# Altium PCB DriveBoardSheet.PcbDoc
Units mil, origin at the board's own origin, x right, y up, seen from the top; angles counter-clockwise.
Board outline 1968.5 x 1968.5 mil, 2 copper layers (Top Layer, Bottom Layer); 14 components, 21 nets, 54 pads, 4 vias.
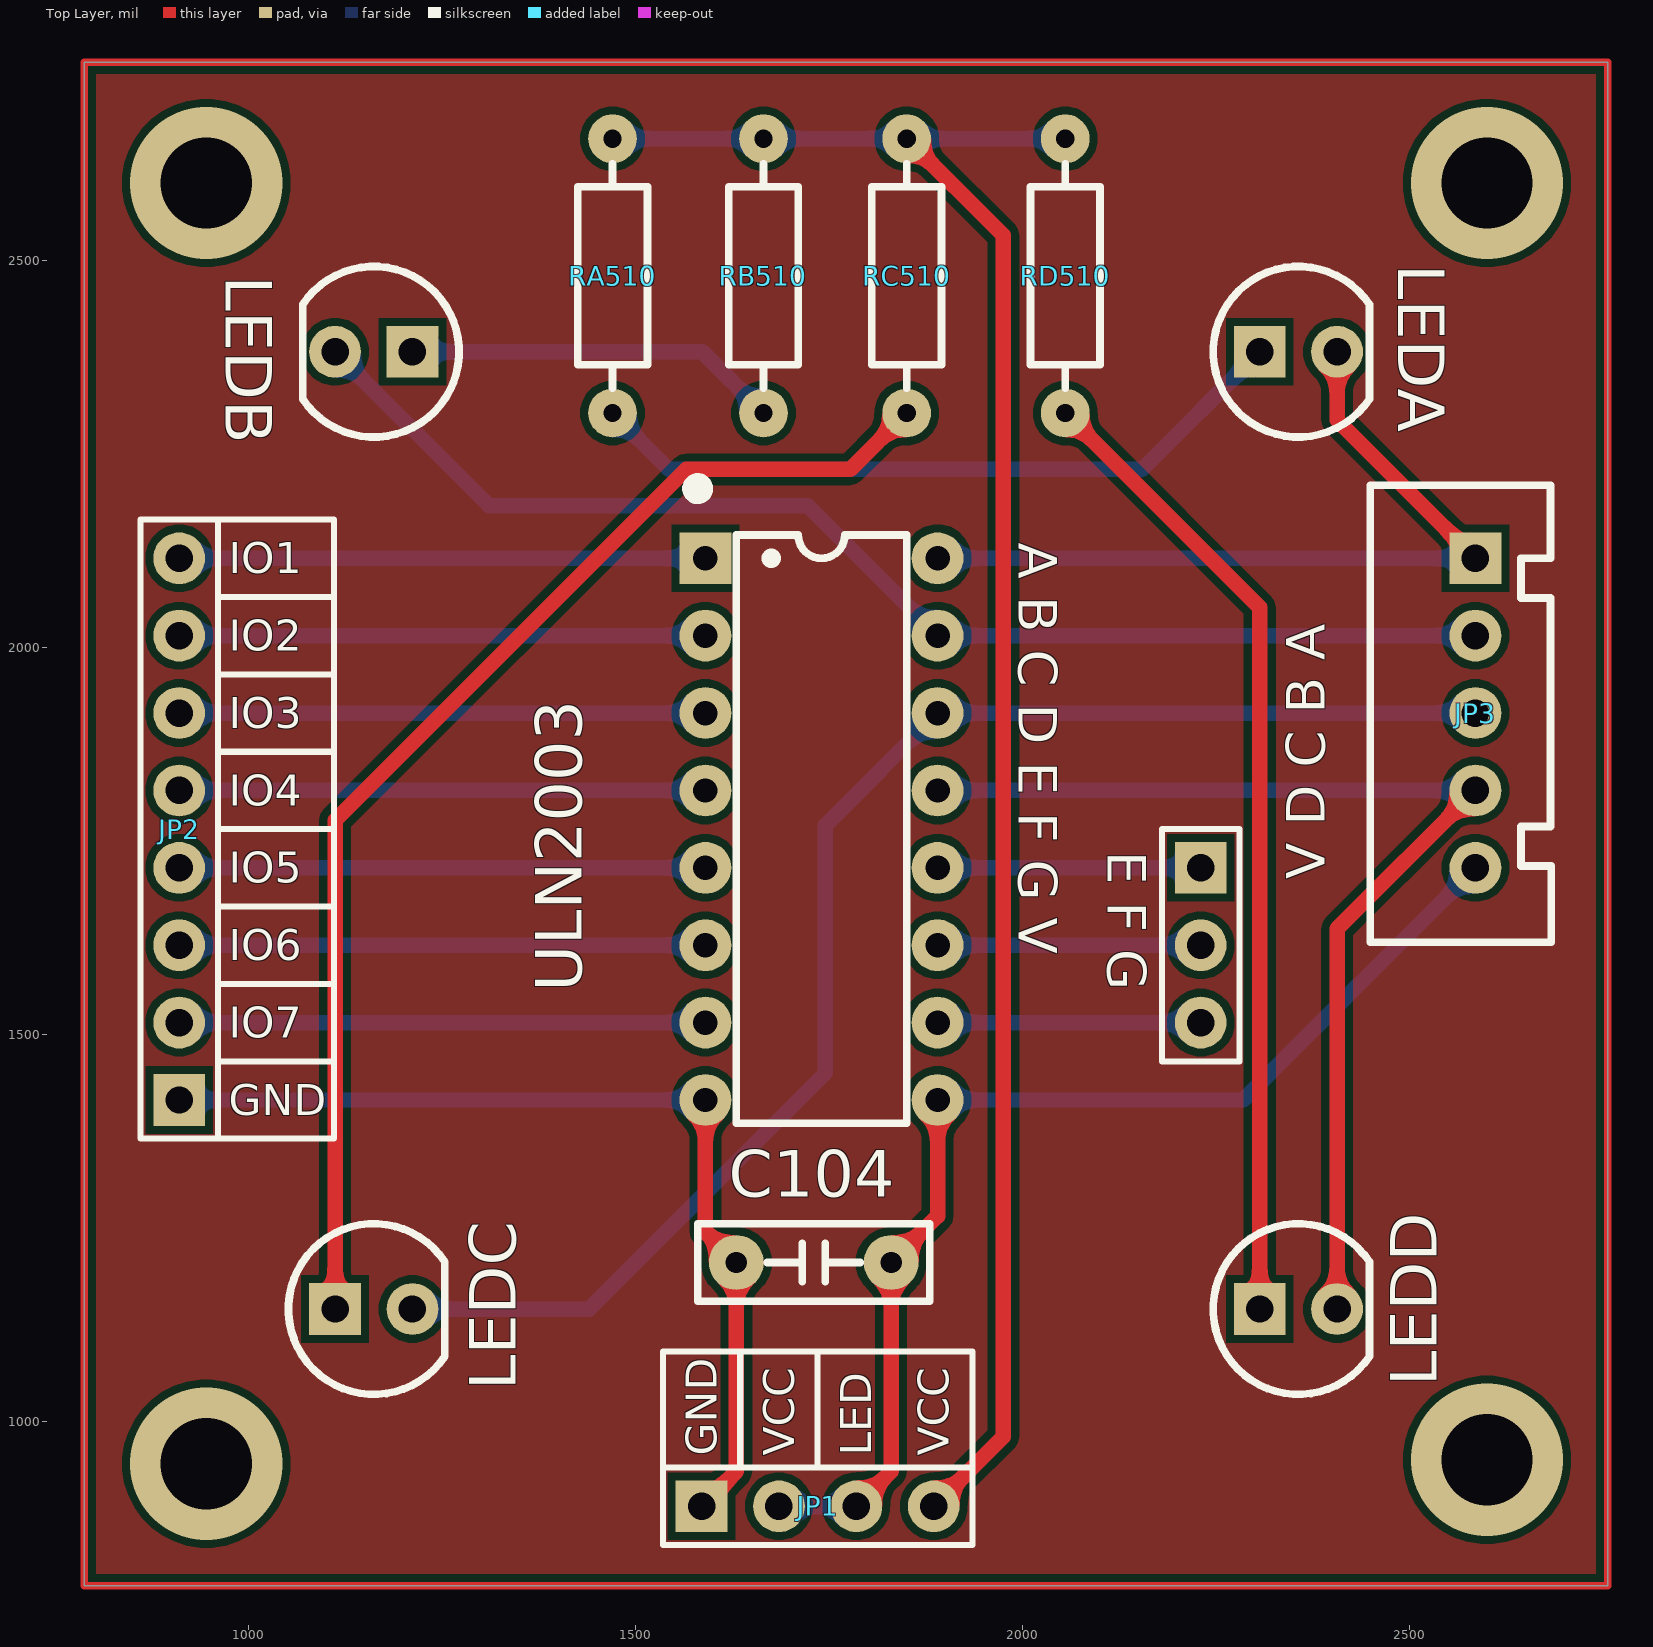
[diagram p0: Top Layer view]
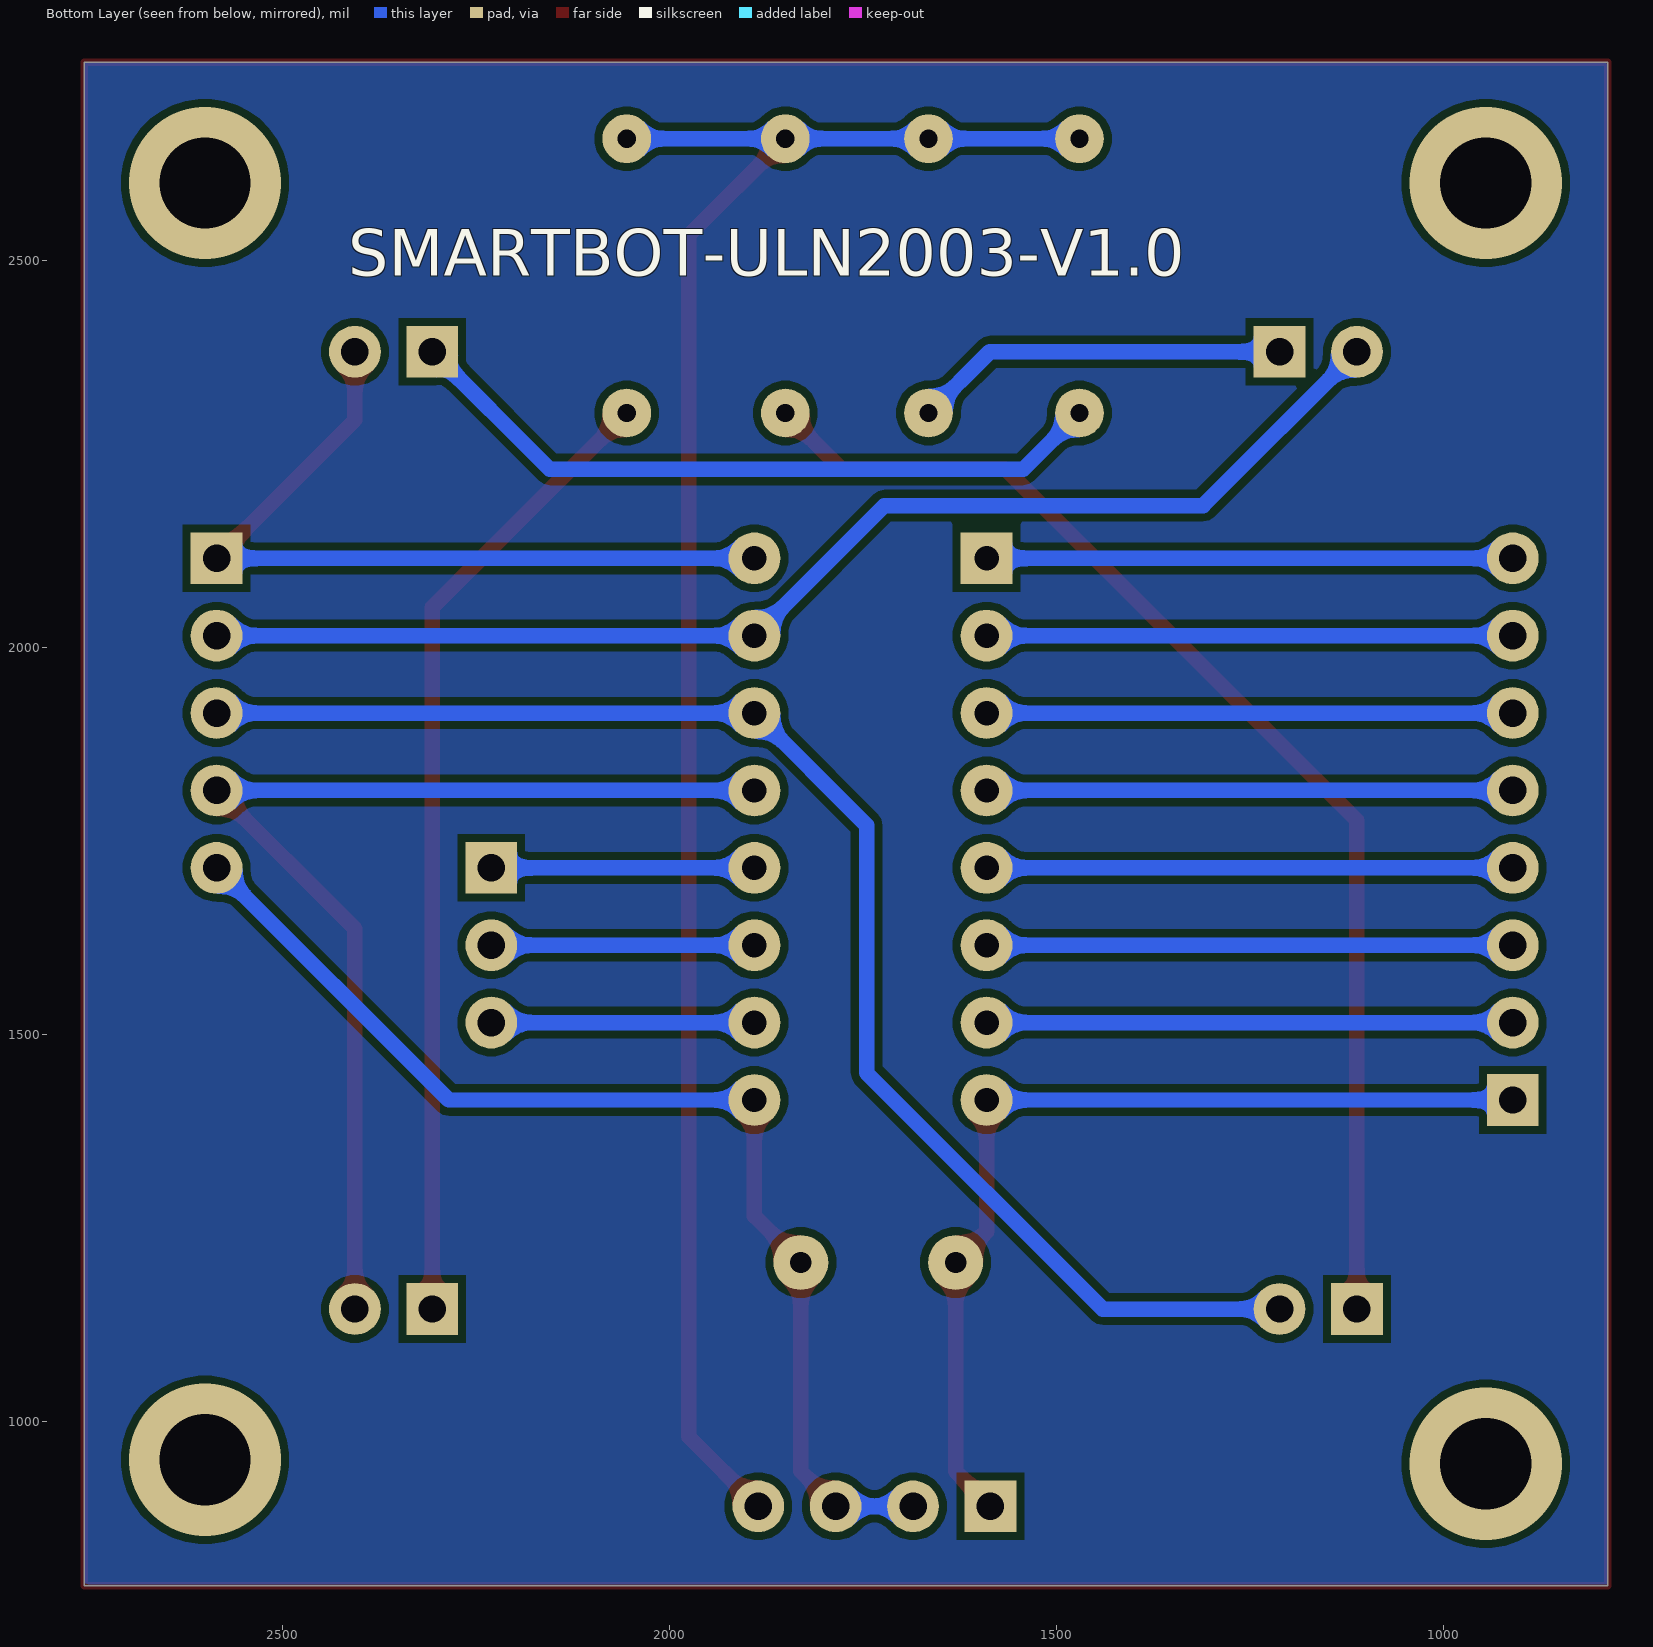
[diagram p1: Bottom Layer view, seen from below]

## Layer stack, top to bottom
Top Solder: solder mask 0.4, Solder Resist, Dk 3.5
Top Layer: signal copper 1.4
Dielectric 1: dielectric 12.6, FR-4, Dk 4.8
Bottom Layer: signal copper 1.4
Bottom Solder: solder mask 0.4, Solder Resist, Dk 3.5

## Board outline
787.4,787.4 2755.91,787.4 2755.91,2755.91 787.4,2755.91
cut-out: 0,0 10,0 10,10 0,10
cut-out: 0,0 10,0 10,10 0,10

## Design rules (kind name [scope] priority, off if disabled: settings)
Clearance [All] p1: gap=10 ignorepadtopadclearanceinfootprint=FALSE except(0: Arc-Hole Track-Hole SMDPad-Hole THPad-Hole Via-Hole Fill-Hole Poly-Hole Region-Hole Text-Hole)
PolygonConnect [All] p1: connectstyle=Relief reliefconductorwidth=10 reliefentries=4 polygonreliefangle="90 Angle" airgapwidth=10
RoomDefinition DriveBoardSheet [InComponentClass('DriveBoardSheet')] p1: confinementstyle=ConfineIn formatcopy=TRUE lockcomponents=FALSE outline 787.4,787.4 2755.91,787.4 2755.91,2755.91 787.4,2755.91
RoutingVias [All] p1: holewidth=28 width=50 viastyle="Through Hole" minholewidth=28 minwidth=50 maxholewidth=28 maxwidth=50
SolderMaskExpansion [All] p1: expansion=4 istentingtop=FALSE
Width [All] p1: maxlimit=20 minlimit=20 preferedwidth=20 minimp=50.000000 maximp=50.000000 favimp=50.000000
30 further rules are at their usual default settings.

## Components (designator, comment, footprint, x,y, rotation, side; value= is the part's Value field where it differs from the comment)
C104 "104" MLCC5.08-A 1730,1205 r0 top
"E F G" "HDR-1X3" HDR-1X3 2230,1715 r270 top
JP1 "HDR-1X4" HDR-1X4-ULN2003-VCC 1585,890 r0 top
JP2 "HDR-1X8" HDR-1X8-ULN2003-IN 910,1415 r90 top
JP3 "HDR-1X5" XH2.54-5P-ULN2003-OUT 2585,2115 r270 top
LEDA "RED" "LED 5MM-R" 2356.3,2381.89 r0 top
LEDB "RED" "LED 5MM-R" 1161.42,2381.89 r180 top
LEDC "RED" "LED 5MM-R" 1161.42,1144.88 r0 top
LEDD "RED" "LED 5MM-R" 2356.3,1144.88 r0 top
RA510 "510" "RS 1/4W" 1470,2480 r90 top
RB510 "210" "RS 1/4W" 1665,2480 r90 top
RC510 "510" "RS 1/4W" 1850,2480 r90 top
RD510 "510" "RS 1/4W" 2055,2480 r90 top
ULN2003 "ULN2003" DIP16-300_MH 1740,1765 r0 top

## Footprints (in the part's own frame and the unit in brackets; to place one, negate y for a bottom-side part, rotate by r counter-clockwise, add the part's x,y. Pads: shape width x height; smd on the part's side, far side on the other; paste and mask are expansions set on the pad)
DIP16-300_MH [mm] "带底座 19.3*7.6*3.8(长宽高）"
  rect 1.7x1.7 hole 0.8: 1(-3.81,8.89)
  round 1.7 hole 0.8: 2(-3.81,6.35) 3(-3.81,3.81) 4(-3.81,1.27) 5(-3.81,-1.27) 6(-3.81,-3.81) 7(-3.81,-6.35) 8(-3.81,-8.89) 9(3.81,-8.89) 10(3.81,-6.35) 11(3.81,-3.81) 12(3.81,-1.27) 13(3.81,1.27) 14(3.81,3.81) 15(3.81,6.35) 16(3.81,8.89)
  silkscreen extent -4.32,-9.65 2.79,11.43, body extent -4.98,-10.25 5,10.25, height 7.5
HDR-1X3 [mm] "排针，3脚"
  rect 1.7x1.7 hole 0.9: 1(0,0)
  round 1.7 hole 0.9: 2(2.54,0) 3(5.08,0)
  silkscreen extent -1.27,-1.27 6.35,1.27, body extent -1.27,-1.27 6.35,1.27, height 8.5
HDR-1X4-ULN2003-VCC [mm] "排针，4脚"
  rect 1.7x1.7 hole 0.9: 1(0,0)
  round 1.7 hole 0.9: 2(2.54,0) 3(5.08,0) 4(7.62,0)
  silkscreen extent -1.27,-1.27 8.89,5.08, body extent -1.27,-1.27 8.89,1.27, height 8.5
HDR-1X8-ULN2003-IN [mm] "排针，8脚"
  rect 1.7x1.7 hole 0.9: 1(0,0)
  round 1.7 hole 0.9: 2(2.54,0) 3(5.08,0) 4(7.62,0) 5(10.16,0) 6(12.7,0) 7(15.24,0) 8(17.78,0)
  silkscreen extent -1.27,-5.08 19.05,1.27, body extent -1.27,-1.27 19.05,1.27, height 8.5
"LED 5MM-R" [mm] "红色5mm直插LED"
  rect 1.7x1.7 hole 0.9: 1(-1.27,0)
  round 1.7 hole 0.9: 2(1.27,0)
  silkscreen extent -2.8,-2.8 2.33,2.8, body extent -2.85,-2.85 2.45,2.85, height 8.75
MLCC5.08-A [mm] "独石电容，脚距5.08mm"
  round 1.8 hole 0.7: 1(-2.54,0) 2(2.54,0)
  silkscreen extent -3.81,-1.27 3.81,1.27, body extent -2.79,-1 2.79,1, height 3.71
"RS 1/4W" [mm] "直插色环电阻，脚距9mm，直径2.3mm"
  round 1.6 hole 0.6: 1(-4.5,0) 2(4.5,0)
  silkscreen extent -3.68,-1.14 3.68,1.14, body extent -4.72,-1.16 4.73,1.16, height 2.32
XH2.54-5P-ULN2003-OUT [mm] "接插件，5P"
  rect 1.7x1.7 hole 0.9: 1(0,0)
  round 1.7 hole 0.9: 2(2.54,0) 3(5.08,0) 4(7.62,0) 5(10.16,0)
  silkscreen extent -2.4,-3.45 12.6,2.49, body extent -2.5,-3.3 12.66,2.4, height 7.03

## Part data
C104: library part C-MLCC, "独石电容", BOM名称=独石电容, 学习资源=www.ooocke.com, 版权归属=源创客
"E F G": library part "Header 3", "3P接插件", BOM名称=3P接插件, 学习资源=www.ooocke.com, 版权归属=源创客
JP1: library part "Header 4", "4P接插件", BOM名称=4P接插件, 学习资源=www.ooocke.com, 版权归属=源创客
JP2: library part "Header 8_ULN2003AN_IN", "8P接插件", BOM名称=8P接插件, 学习资源=www.ooocke.com, 版权归属=源创客
JP3: library part "Header 5", "5P接插件", BOM名称=5P接插件, 学习资源=www.ooocke.com, 版权归属=源创客
LEDA LEDB LEDC LEDD: library part LED-5MM, "5mm插件LED", BOM名称=5mm插件LED, 学习资源=www.ooocke.com, 版权归属=源创客
RA510 RB510 RC510 RD510: library part R-CRR, "直插色环电阻", BOM名称=色环电阻, 学习资源=www.ooocke.com, 版权归属=源创客
ULN2003: library part ULN2003-2, "达林顿驱动芯片", BOM名称=达林顿驱动芯片, 学习资源=www.ooocke.com, 版权归属=源创客

## Via types
v1: diameter 196.85, hole 118.11, Top Layer to Bottom Layer, 4 vias

## Nets (pads, with @x,y where several pads share a name; then routed paths per layer and width w, separated by ;. In a path a pad name is that pad's centre, name@x,y a point inside that pad or via, vN(x,y) a via of type N, cw(c..) or ccw(c..) an arc to the next point about the centre after c; other vN are vias at no path point)
GND: C104.1 JP1.1 JP2.1 ULN2003.8 | length 1240.2
  Top Layer w20: JP1.1 1630,935 C104.1 1590,1245 ULN2003.8
  Bottom Layer w20: JP2.1 ULN2003.8
"NetE F G_1": "E F G.1" ULN2003.12 | length 340
  Bottom Layer w20: ULN2003.12 2230,1715
"NetE F G_2": "E F G.2" ULN2003.11 | length 340
  Bottom Layer w20: ULN2003.11 2230,1615
"NetE F G_3": "E F G.3" ULN2003.10 | length 340
  Bottom Layer w20: ULN2003.10 2230,1515
NetJP1_4: JP1.4 RA510.2 RB510.2 RC510.2 RD510.2 | length 2441.2
  Top Layer w20: RC510.2 1975,2532.17 1975,980 JP1.4
  Bottom Layer w20: RA510.2 RB510.2 RC510.2 RD510.2
NetJP2_2: JP2.2 ULN2003.7 | length 680
  Bottom Layer w20: JP2.2 ULN2003.7
NetJP2_3: JP2.3 ULN2003.6 | length 680
  Bottom Layer w20: JP2.3 ULN2003.6
NetJP2_4: JP2.4 ULN2003.5 | length 680
  Bottom Layer w20: JP2.4 ULN2003.5
NetJP2_5: JP2.5 ULN2003.4 | length 680
  Bottom Layer w20: JP2.5 ULN2003.4
NetJP2_6: JP2.6 ULN2003.3 | length 680
  Bottom Layer w20: JP2.6 ULN2003.3
NetJP2_7: JP2.7 ULN2003.2 | length 680
  Bottom Layer w20: JP2.7 ULN2003.2
NetJP2_8: JP2.8 ULN2003.1 | length 680
  Bottom Layer w20: JP2.8 ULN2003.1
NetJP3_1: JP3.1 LEDA.2 ULN2003.16 | length 1035.9
  Top Layer w20: LEDA.2 2406.3,2293.7 JP3.1
  Bottom Layer w20: ULN2003.16 JP3.1
NetJP3_2: JP3.2 LEDB.2 ULN2003.15 | length 1625.6
  Bottom Layer w20: LEDB.2 1310.31,2183 1722,2183 ULN2003.15 JP3.2
NetJP3_3: JP3.3 LEDC.2 ULN2003.14 | length 1880
  Bottom Layer w20: LEDC.2 1439.88,1144.88 1745,1450 1745,1770 ULN2003.14 JP3.3
NetJP3_4: JP3.4 LEDD.2 ULN2003.13 | length 1439.1
  Top Layer w20: LEDD.2 2406.3,1636.3 JP3.4
  Bottom Layer w20: ULN2003.13 JP3.4
NetLEDA_1: LEDA.1 RA510.1 | length 929.4
  Bottom Layer w20: RA510.1 1542.84,2230 2154.41,2230 LEDA.1
NetLEDB_1: LEDB.1 RB510.1 | length 486.3
  Bottom Layer w20: LEDB.1 1585.94,2381.89 RB510.1
NetLEDC_1: LEDC.1 RC510.1 | length 1588.2
  Top Layer w20: LEDC.1 1111.42,1776.42 1565,2230 1777.16,2230 RC510.1
NetLEDD_1: LEDD.1 RD510.1 | length 1262
  Top Layer w20: RD510.1 2306.3,2051.54 LEDD.1
VCC: C104.2 JP1.2 JP1.3 JP3.5 ULN2003.9 | length 1487.8
  Top Layer w20: JP1.3 1830,935 C104.2 1890,1265 ULN2003.9
  Bottom Layer w20: JP1.2 JP1.3 ; ULN2003.9 2285,1415 JP3.5
copper on no net: | length 7874
  Top Layer w10: 787.4,787.4 787.4,2755.91 2755.91,2755.91 2755.91,787.4 787.4,787.4
  other v1: 945,945 2600,950 945,2600 2600,2600

## Polygon pours and split planes (outlines as drawn)
no net on Top Layer "NONET_L-01_P-001" (solid, pour order 0): 787.4,2755.91 2755.91,2755.91 2755.91,787.4 787.4,787.4
no net on Bottom Layer "NONET_L-01_P-001" (solid, pour order 1): 2755,2755 2755,785 2751,789 788.91,789 788.91,2753.91 790,2755

## Silkscreen, mask and mechanical layers (free items; w line width, h text height)
Top Overlay:
  text "A B C D E F G V" at 1995,2135 h50 r270
  text "V D C B A" at 2390,1700 h50 r90
Bottom Overlay:
  text "SMARTBOT-ULN2003-V1.0" at 2415,2480 h60

## Text inside footprints (layer, text, board x,y; h text height)
JP1: Top Overlay "VCC" at 1904.53,955.12 h40 r90; Top Overlay "LED" at 1804.53,955.12 h40 r90; Top Overlay "VCC" at 1704.53,955.12 h40 r90; Top Overlay "GND" at 1604.53,955.12 h40 r90
JP2: Top Overlay "GND" at 973.94,1395.47 h40; Top Overlay "IO7" at 973.94,1495.47 h40; Top Overlay "IO6" at 973.94,1595.47 h40; Top Overlay "IO5" at 973.94,1695.47 h40; Top Overlay "IO4" at 973.94,1795.47 h40; Top Overlay "IO3" at 973.94,1895.47 h40; Top Overlay "IO2" at 973.94,1995.47 h40; Top Overlay "IO1" at 973.94,2095.47 h40